# EAGLE board uc4h airspeed v020-wholes (EAGLE 7.5.0)
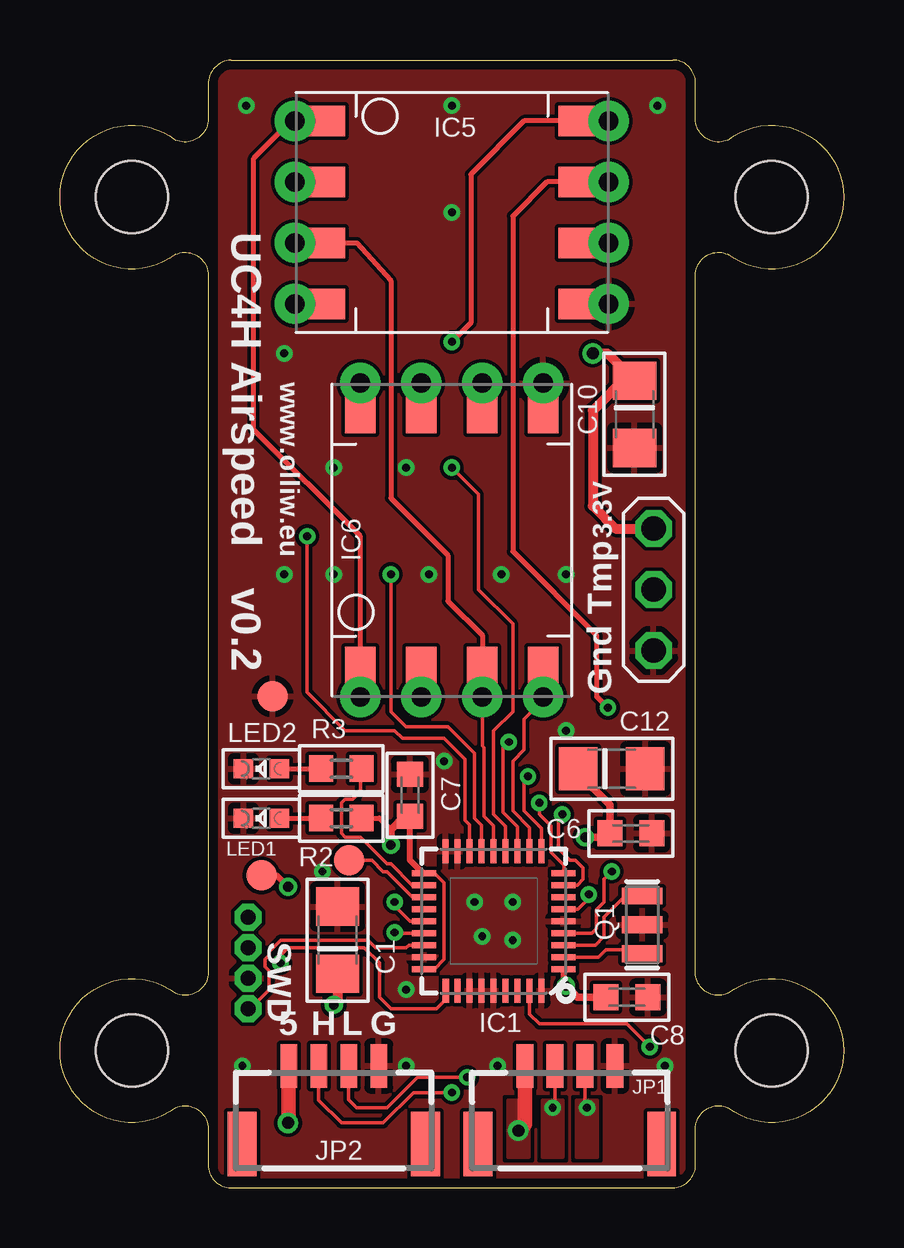
[diagram p0: board, top side]
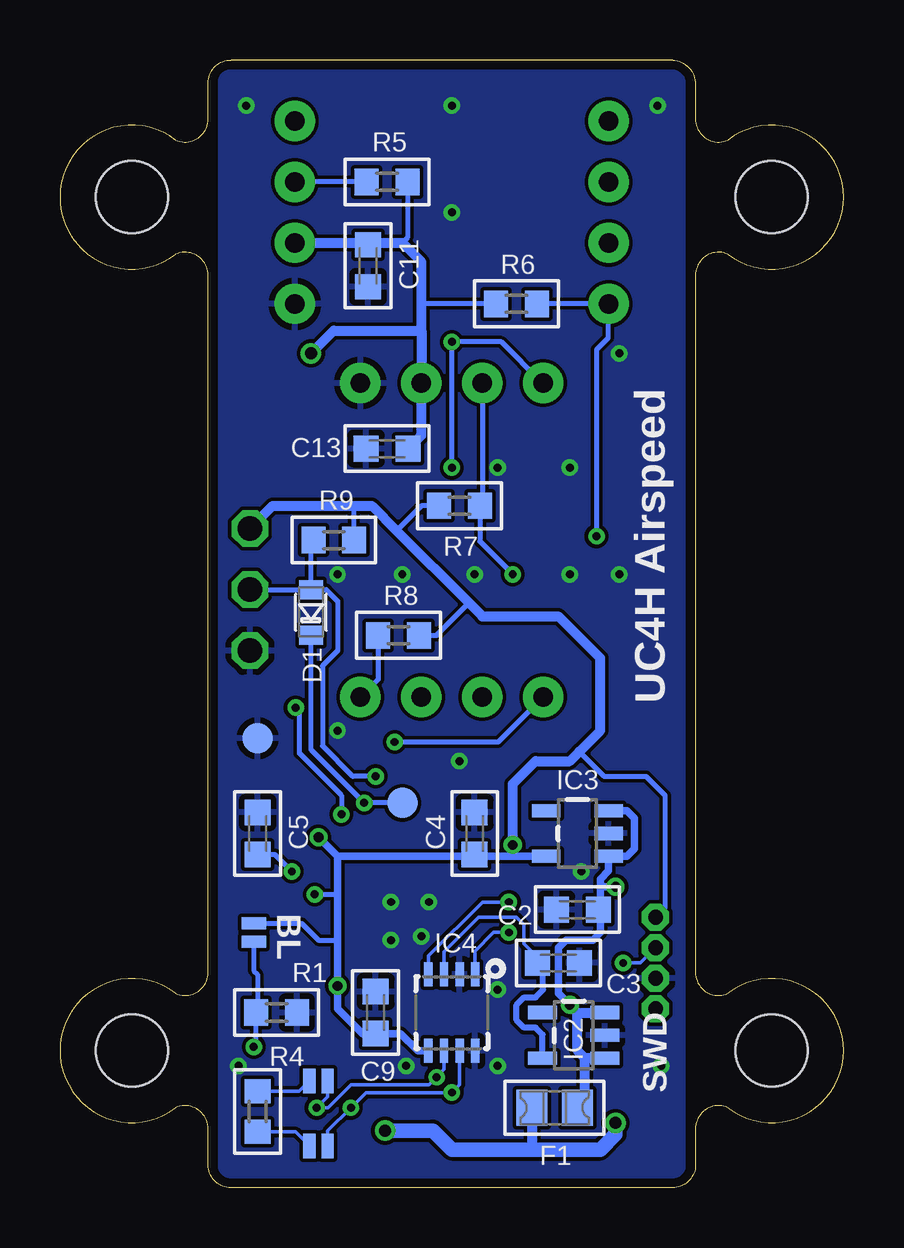
[diagram p1: board, bottom side, seen from below]

Size 32.67 x 46.99 mm. Coordinates in mm from the lower left corner, seen from the top.
Outline: 7.13,0 25.54,0 arc90 26.5,0.95 26.5,2.46 arc-114 27.84,3.33 arc255 27.84,8.1 arc-114 26.5,8.97 26.5,38.02 arc-114 27.84,38.89 arc255 27.84,43.66 arc-114 26.5,44.53 26.5,46.04 arc90 25.54,46.99 7.13,46.99 arc90 6.18,45.88 6.18,44.53 arc-114 4.83,43.66 arc255 4.83,38.89 arc-114 6.18,38.02 6.18,8.97 arc-114 4.83,8.1 arc255 4.83,3.33 arc-114 6.18,2.46 6.18,0.95 arc90 7.13,0
Copper layers (1*16): Top 0.0356mm / dielectric 1.5011mm / Bottom 0.0356mm
Design rules "ow-oshpark-2layer": minimum track width 6mil, minimum drill 13mil, track to track 6mil, track to pad 6mil, pad to pad 6mil, via to via 6mil, smd to smd 6mil, copper to edge 15mil, drill to drill 6mil, minimum pad ring 7mil, minimum via ring 7mil, stop-mask expansion 2.5mil, vias tented up to drill 26mil, thermal gap 10mil
Holes 3 mm at 3,41.27 29.67,41.27 3,5.71 29.67,5.71

## Footprints (pad centres in the part's own frame; a part is rotated, then mirrored left to right if it is on the bottom)
C1206 = smd 1.6 x 1.8: 1 -1.4,0; 2 1.4,0
C0603K = smd 1.05 x 1.08: 1 -0.875,0; 2 0.875,0
SOD110-R = smd 0.8 x 1: A 0.95,0; C -0.95,0
FUSE-0805 = smd 1.3 x 1.5: 1 -0.95,0; 2 0.95,0
VFQFPN36 = smd 1 x 0.25: 1 -2.9,2; 2 -2.9,1.5; 3 -2.9,1; 4 -2.9,0.5; 5 -2.9,0; 6 -2.9,-0.5; 7 -2.9,-1; 8 -2.9,-1.5; 9 -2.9,-2; 19 2.9,-2; 20 2.9,-1.5; 21 2.9,-1; 22 2.9,-0.5; 23 2.9,0; 24 2.9,0.5; 25 2.9,1; 26 2.9,1.5; 27 2.9,2 | smd 0.25 x 1: 10 -2,-2.9; 11 -1.5,-2.9; 12 -1,-2.9; 13 -0.5,-2.9; 14 0,-2.9; 15 0.5,-2.9; 16 1,-2.9; 17 1.5,-2.9; 18 2,-2.9; 29 1.5,2.9; 30 1,2.9; 31 0.5,2.9; 32 0,2.9; 33 -0.5,2.9; 34 -1,2.9; 35 -1.5,2.9; 36 -2,2.9 | smd 0.27 x 1: 28 2,2.9
SOT23-5 = smd 0.55 x 1.2: 1 -0.95,-1.3; 2 0,-1.3; 3 0.95,-1.3; 4 0.95,1.3; 5 -0.95,1.3
HVSON8 = smd 1 x 0.35: 1 -1.6,0.975; 2 -1.6,0.325; 3 -1.6,-0.325; 4 -1.6,-0.975; 5 1.6,-0.975; 6 1.6,-0.325; 7 1.6,0.325; 8 1.6,0.975
HONEYWELL-8 = drill 0.813 pad 1.676: 1 -6.54,3.81; 2 -6.54,1.27; 3 -6.54,-1.27; 4 -6.54,-3.81; 5 6.54,-3.81; 6 6.54,-1.27; 7 6.54,1.27; 8 6.54,3.81 | smd 2.54 x 1.27: P$9 -5.715,3.81; P$10 -5.715,1.27; P$11 -5.715,-1.27; P$12 -5.715,-3.81; P$13 5.715,-3.81; P$14 5.715,-1.27; P$15 5.715,1.27; P$16 5.715,3.81
SM04B-GHS-TB = smd 0.7 x 1.8: 1 -1.875,4.6; 2 -0.625,4.6; 3 0.625,4.6; 4 1.875,4.6 | smd 1.2 x 2.7: FIT@1 -3.825,1.35; FIT@2 3.825,1.35
PINHEAD_3X1 = drill 1.016 octagon: 1 0,0; 2 0,-2.54; 3 0,-5.08
CHIPLED_0603 = smd 0.8 x 0.8: A 0,-0.75; C 0,0.75
RESONATOR-SMD = smd 0.7 x 1.7: 1 -1.2,0; 2 0,0; 3 1.2,0
R0603 = smd 1 x 1.1: 1 -0.85,0; 2 0.85,0
SJ_2S-NO = smd 0.508 x 1.016: 1 -0.381,0; 2 0.381,0
4X1_1P27_OCT_BILEX = drill 0.61 pad 1.118 octagon: 1 0,0; 2 0,-1.27; 3 0,-2.54; 4 0,-3.81
B1,27 = smd 1.27 x 1.27: TP 0,0

## Placement (x,y rotation side)
C1  10u/20V  [C1206]  11.57,10.32 90 top
C2  100n  [C0603K]  11.1,11.59 180 bottom
C3  1u  [C0603K]  11.89,9.37 0 bottom
C4  1u  [C0603K]  15.38,14.76 90 bottom
C5  100n  [C0603K]  24.43,14.76 90 bottom
C6  100n  [C0603K]  23.8,14.76 0 top
C7  100n  [C0603K]  14.59,16.35 90 top
C8  100n  [C0603K]  23.64,7.94 0 top
C9  100n  [C0603K]  19.51,7.3 90 bottom
C10  10u/10V  [C1206]  23.96,32.23 270 top
C11  100n  [C0603K]  19.83,38.42 270 bottom
C12  10u/10V  [C1206]  23,17.46 0 top
C13  100n  [C0603K]  19.03,30.8 180 bottom
D1  BAT54J  [SOD110-R]  22.21,23.97 90 bottom
F1  0ZCK0020FF2G  [FUSE-0805]  12.05,3.33 180 bottom
IC1  STM32F103T8  [VFQFPN36]  18.08,11.11 180 top
IC2  MIC5219-5.0YM5-TR  [SOT23-5]  11.26,6.35 90 bottom
IC3  MIC5219-3.3YM5-TR  [SOT23-5]  11.1,14.76 90 bottom
IC4  TJA1051TK/3  [HVSON8]  16.34,7.3 270 bottom
IC5  HW-RSC  [HONEYWELL-8]  16.34,40.64 0 top
IC6  HW-RSC  [HONEYWELL-8]  16.34,26.99 90 top
JP1  JST-GH-4  [SM04B-GHS-TB]  21.26,0.48 0 top
JP2  JST-GH-4  [SM04B-GHS-TB]  11.41,0.48 0 top
JP3  PINHEAD_3X1  [PINHEAD_3X1]  24.75,27.46 0 top
LED1  red  [CHIPLED_0603]  8.4,15.4 90 top
LED2  green  [CHIPLED_0603]  8.4,17.46 90 top
Q1  CSTCE8M00G55-R0  [RESONATOR-SMD]  24.27,10.95 90 top
R1  10k  [R0603]  23.64,7.3 180 bottom
R2  4.7k  [R0603]  11.73,15.4 180 top
R3  1k  [R0603]  11.73,17.46 180 top
R4  120  [R0603]  24.43,3.17 90 bottom
R5  1k  [R0603]  19.03,41.91 0 bottom
R6  1k  [R0603]  13.64,36.83 180 bottom
R7  1k  [R0603]  16.02,28.42 180 bottom
R8  1k  [R0603]  18.56,23.02 0 bottom
R9  4.7k  [R0603]  21.26,26.99 0 bottom
SJ1  BOOT0  [SJ_2S-NO]  24.59,10.64 270 bottom
SJ2  [SJ_2S-NO]  21.89,1.75 0 bottom
SJ3  [SJ_2S-NO]  21.89,4.45 0 bottom
SWD  PH4  [4X1_1P27_OCT_BILEX]  7.84,11.27 0 top
TP1  TPB1,27  [B1,27]  12.05,13.65 0 top
TP2  TPB1,27  [B1,27]  8.87,20.48 0 top
TP3  TPB1,27  [B1,27]  8.4,13.02 0 top
TP4  TPB1,27  [B1,27]  18.4,16.03 0 bottom
TP5  TPB1,27  [B1,27]  24.43,18.73 0 bottom

## Library data of the parts
C1-C13 R1-R9 = rcl
D1 = diode
F1 IC4-IC6 JP1-JP3 SWD = # stdlib
IC1 = # stm32
IC2 IC3 Q1 SJ1-SJ3 = # SparkFun2
LED1 LED2 = led
TP1-TP5 = testpad

## Nets
3.3V: C4.1 C6.1 C7.1 C8.1 C9.1 C10.1 C11.1 C12.1 C13.1 IC1.1 IC1.6 IC1.19 IC1.27 IC3.5 IC4.5 IC5.6 IC6.6 JP3.1 R2.1 R5.2 R6.2 R7.2 R8.2 R9.2 SJ1.1 SWD.1
5V: C3.1 IC2.5 IC4.3
A1: IC1.33
A2: IC1.34
CAN-5V: C1.1 C2.1 F1.1 IC2.1 IC2.3 IC3.1 IC3.3 TP3.TP
CAN-PWR-IN: F1.2 JP1.1 JP2.1
CANH: IC4.7 JP1.2 JP2.2 SJ2.2
CANL: IC4.6 JP1.3 JP2.3 SJ3.2
CANRX: IC1.23 IC4.4
CANTX: IC1.24 IC4.1
CS: IC1.16 IC5.4 R6.1
CS2: IC1.11 IC6.4 R8.1
CS_EE: IC1.8 IC5.7 R5.1
CS_EE2: IC1.15 IC6.7 R7.1
DRDY: IC5.2
DRDY2: IC6.2
GND: C1.2 C2.2 C3.2 C4.2 C5.2 C6.2 C7.2 C8.2 C9.2 C10.2 C11.2 C12.2 C13.2 IC1.5 IC1.17 IC1.18 IC1.26 IC1.30 IC1.31 IC1.32 IC1.36 IC2.2 IC3.2 IC4.2 IC4.8 IC5.5 IC6.5 JP1.4 JP2.4 JP3.3 LED1.C LED2.C Q1.2 R1.1 SWD.3 TP2.TP TP5.TP
LED: IC1.20 R3.1
N$1: C5.1 IC1.4
N$2: LED2.A R3.2
N$4: R4.1 SJ2.1
N$5: IC1.2 Q1.1
N$6: IC1.3 Q1.3
N$7: R4.2 SJ3.1
N$8: IC1.35 R1.2 SJ1.2
N$9: LED1.A R2.2
RX1: IC1.22
RX2: D1.A IC1.10 JP3.2 R9.1
SCK: IC1.12 IC5.1 IC6.1
SDI: IC1.14 IC5.3 IC6.3
SDO: IC1.13 IC5.8 IC6.8
SWCLK: IC1.28 SWD.2
SWDIO: IC1.25 SWD.4
TX1: IC1.21 TP1.TP
TX2: D1.C IC1.9 TP4.TP

## Tracks (layer width: path | path; a pad name or v marks a point on that pad's centre or on a via)
3.3V  (via drill 0.33, 0.4, 0.5)
  Top 0.152: IC1.19 15.61,13.11 16.02,12.7 16.02,9.53 15.61,9.11 IC1.27 | 23,14.85 C6.1 | 14.51,15.4 C7.1 14.35,15.48 | 20.98,8.46 v21.1,8.41 | IC1.6 21.6,11.61 22.05,12.06 v22.05,12.22
  Top 0.203: R2.1 13.32,15.4 13.8,14.92
  Top 0.254: IC1.19 15.02,13.22 14.59,13.65 C7.1 | IC1.1 20.98,8.46
  Top 0.305: v21.89,14.61 22.69,14.61 22.84,14.76 C6.1 22.92,15.96 21.6,17.27 C12.1 | v13.8,14.29 13.8,14.92 14.35,15.48 | C8.1 21.57,7.94 v21.1,8.41
  Top 0.406: JP3.1 23.16,27.46 22.21,28.42 22.21,32.38 23.77,33.94 C10.1 22.82,34.77 v22.21,34.77
  Bottom 0.152: 21.16,8.48 v21.1,8.41
  Bottom 0.203: 15.54,13.81 15.22,13.81 | R6.2 17.61,36.83 | R5.2 18.18,39.59 18.4,39.37 | 22.74,28.31 22.84,28.42 | SWD.1 7.45,11.67 7.45,16.35 8.24,17.14 9.99,17.14 11.02,18.18 | R8.2 16.97,23.02 15.62,24.37 | R9.2 20.41,28.36 20.62,28.42 | R7.2 17.61,28.42 18.64,27.38 | v22.05,12.22 21.1,12.22 | SJ1.1 22.59,11.02 21.89,10.32 21.1,10.32
  Bottom 0.305: IC3.5 13.8,13.81 | 13.8,13.81 15.22,13.81 15.47,13.97 C4.1 | 15.54,13.81 21.1,13.81 | IC4.5 17.75,5.7 18.48,6.43 C9.1 20.06,6.43 21.1,7.46 v21.1,8.41 21.1,10.32 21.1,12.22 21.1,13.81 | v13.8,14.29 13.8,13.81 | v21.89,14.61 21.1,13.81
  Bottom 0.406: v22.21,34.77 21.26,35.72 17.61,35.72 | 17.61,35.72 IC6.6 17.61,31.35 C13.1 | 17.61,35.72 17.61,36.83 17.61,38.58 18.4,39.37 19.99,39.37 | IC5.6 19.99,39.37 | C11.1 19.99,39.37 | JP3.1 23.8,28.42 22.84,28.42 20.62,28.42 19.67,28.42 18.64,27.38 15.62,24.37 15.07,23.81 11.89,23.81 10.14,22.07 10.14,19.05 11.02,18.18 11.41,17.78 12.84,17.78 13.8,16.83 v13.8,14.29
5V
  Bottom 0.152: IC4.3 16.66,9.84 15.22,11.27 13.64,11.27 13.32,10.95 13.32,10.16 12.68,9.53 12.68,9.29 C3.1
  Bottom 0.254: IC2.5 12.56,6.38 12.84,6.67 13.32,6.67 13.64,6.99 13.64,7.62 13.32,7.94 12.84,7.94 12.53,8.26 12.53,9.29
  Bottom 0.305: 12.53,9.29 C3.1
CAN-5V  (via drill 0.4)
  Top 0.254: TP3.TP 9.03,13.02 v9.51,12.54
  Top 0.406: C1.1 11.57,7.78 v11.41,7.62
  Bottom 0.305: IC3.3 9.03,15.71 8.72,15.4 8.72,14.13 9.03,13.81 IC3.1 9.8,13.21 10.14,12.86 10.14,12.54 | IC2.1 10.62,5.4 | IC2.3 | v11.41,7.62 11.89,8.1 11.89,10 11.57,10.32 10.46,10.32 10.14,10.64 10.14,11.35 C2.1 10.14,11.51 10.14,12.54 | v9.51,12.54 10.14,12.54
  Bottom 0.406: IC2.1 10.78,5.4 | 10.78,5.4 11.1,5.71 11.1,7.3 | 11.1,7.3 IC2.3 | v11.41,7.62 11.1,7.3 | F1.1 10.94,3.33 10.78,3.49 10.78,5.4
CAN-PWR-IN  (via drill 0.5)
  Top 0.152: v9.51,2.7 9.54,2.67
  Top 0.61: 9.54,2.67 JP2.1 | JP1.1 19.38,2.65 v19.11,2.38
  Bottom 0.406: F1.2 13,1.75 13,1.59
  Bottom 0.61: v19.11,2.38 17.13,2.38 16.34,1.59 13,1.59 10.14,1.59 9.51,2.22 v9.51,2.7
  pour Top (no thermals): 19.55,3.65 18.68,3.65 18.68,1.27 19.55,1.27
CANH  (via drill 0.33)
  Top 0.152: JP2.2 10.79,3.64 11.73,2.7 13.48,2.7 14.75,3.97 v16.34,3.97 | JP1.2 20.63,3.42 v20.54,3.33
  Bottom 0.152: IC4.7 16.01,4.29 v16.34,3.97 19.91,3.97 v20.54,3.33 21.51,2.37 SJ2.2
  pour Top (no thermals): 20.11,3.65 20.98,3.65 20.98,1.27 20.11,1.27
CANL  (via drill 0.33)
  Top 0.152: JP2.3 12.04,3.66 12.37,3.33 13.64,3.33 14.91,4.6 v16.97,4.6 | JP1.3 21.88,3.48 v21.97,3.33
  Bottom 0.152: IC4.6 16.66,4.93 v16.97,4.6 17.29,4.29 20.54,4.29 21.49,3.33 v21.97,3.33 21.51,3.79 SJ3.2
  pour Top (no thermals): 21.53,3.65 22.41,3.65 22.41,1.27 21.53,1.27
CANRX  (via drill 0.33)
  Top 0.152: IC1.23 14.59,11.11 13.95,11.75 v13.95,11.91
  Bottom 0.152: IC4.4 17.31,9.66 15.07,11.91 v13.95,11.91
CANTX  (via drill 0.33)
  Top 0.152: IC1.24 13.98,10.61 v13.95,10.64
  Bottom 0.152: IC4.1 15.36,9.87 14.59,10.64 v13.95,10.64
CS  (via drill 0.33)
  Top 0.152: v10.3,27.15 10.3,20.64 11.89,19.05 13.95,19.05 14.27,18.73 16.02,18.73 16.89,17.86 16.89,15.32 17.08,15.13 IC1.16
  Bottom 0.152: 9.83,36.8 IC5.4
  Bottom 0.203: R6.1 9.86,36.83 9.83,36.8 9.83,35.4 10.3,34.92 v10.3,27.15
CS2
  Top 0.152: IC6.4 20.15,20.32 19.35,19.53 19.35,18.26 18.88,17.78 18.88,15.72 19.58,15.01 IC1.11
  Bottom 0.203: R8.1 19.41,21.18 IC6.4
CS_EE  (via drill 0.33)
  Top 0.152: IC1.8 21.57,12.61 21.81,12.86 21.81,13.34 21.49,13.65 21.26,13.65 20.78,14.13 20.78,15.4 v20.94,15.56
  Top 0.203: IC5.7 20.3,41.91 18.88,40.48 18.88,26.51 22.37,23.02 22.37,20.48 v22.84,20
  Bottom 0.203: R5.1 IC5.7 | v20.94,15.56 20.94,16.35 22.69,18.1 22.69,19.84 v22.84,20
CS_EE2  (via drill 0.33)
  Top 0.152: v13.8,25.56 13.8,19.84 14.43,19.21 16.18,19.21 17.29,18.1 17.29,15.4 17.58,15.11 IC1.15
  Bottom 0.203: IC6.7 15.07,28.52 R7.1 15.17,26.93 v13.8,25.56
GND  (via drill 0.33)
  other vias: 17.29,11.91 17.61,10.48 18.88,10.32 18.88,11.91 14.43,8.26 14.43,5.08 18.24,5.08 7.6,5.08 25.23,5.08 10.94,13.18 11.41,25.56 14.43,30 11.41,30 9.35,25.56 18.4,25.56 7.76,45.09 24.91,45.09 16.34,40.64 9.35,34.77 16.34,45.09 21.1,25.56 15.38,25.56 16.02,17.78 21.1,19.05
  pour Bottom (isolate 0.152, rank 6): 6.65,46.67 26.02,46.67 26.02,0.16 6.65,0.16
  pour Top (isolate 0.152, rank 6): 6.65,46.67 26.02,46.67 26.02,0.16 6.65,0.16
LED
  Top 0.152: R3.1 12.53,17.41 12.53,16.51 12.21,16.19 11.89,16.19 11.73,16.03 11.73,14.76 11.89,14.61 12.53,14.61 13.64,13.49 13.8,13.49 14.68,12.61 IC1.20
N$1  (via drill 0.33)
  Top 0.152: IC1.4 22.19,10.61 22.37,10.79 22.37,11.59 22.69,11.91 22.69,12.86 v23,13.18
  Bottom 0.203: C5.1 23.72,13.89 v23,13.18
N$2
  Top 0.203: LED2.A R3.2
N$4
  Bottom 0.152: R4.1 22.85,2.33 SJ2.1
N$5
  Top 0.152: IC1.2 22.46,9.61 22.76,9.91 24.11,9.91 Q1.1
N$6
  Top 0.152: IC1.3 22.32,10.11 22.69,10.48 22.69,11.27 23.64,12.22 23.96,11.91 24.18,12.06 Q1.3
N$7
  Bottom 0.152: R4.2 22.69,4.03 SJ3.1
N$8  (via drill 0.33)
  Top 0.152: IC1.35 19.58,7.23 19.99,6.83 23.64,6.83 v24.59,5.87
  Bottom 0.152: 24.43,6.88 R1.2
  Bottom 0.203: SJ1.2 24.59,9.05 24.43,8.89 24.43,7.36 R1.2 24.49,5.98 v24.59,5.87
N$9
  Top 0.203: LED1.A R2.2
RX2  (via drill 0.33)
  Top 0.152: IC1.10 20.08,14.99 19.35,15.72 19.35,16.99 v19.51,17.14
  Bottom 0.203: v19.51,17.14 20.46,17.14 21.73,18.41 21.73,21.75 21.1,22.38 21.1,24.45 21.57,24.92 D1.A | D1.A 22.21,26.89 R9.1 | JP3.2 D1.A
SCK  (via drill 0.33)
  Top 0.152: IC1.12 19.08,15.03 18.48,15.64 18.48,18.34 v18.72,18.57
  Top 0.203: IC6.1 12.53,27.15 8.08,31.59 8.08,42.89 9.64,44.45 IC5.1
  Bottom 0.203: v18.72,18.57 14.4,18.57 IC6.1
SDI
  Top 0.152: IC1.14 18.08,15.08 17.68,15.48 17.68,18.34 17.61,18.41 IC6.3
  Top 0.203: IC6.3 17.61,23.02 16.18,24.45 16.18,26.35 13.8,28.73 13.8,37.78 12.37,39.37 IC5.3
SDO  (via drill 0.33)
  Top 0.152: IC1.13 18.58,15.06 18.08,15.56 18.08,19.05 18.88,19.84 18.88,23.5 17.45,24.92 17.45,28.89 v16.34,30
  Top 0.203: IC6.8 12.49,33.53 | IC5.8 19.35,44.45 17.13,42.23 17.13,36.04 v16.34,35.24
  Bottom 0.152: IC6.8 12.56,33.53
  Bottom 0.203: v16.34,30 v16.34,35.24 14.27,35.24 12.56,33.53
SWCLK  (via drill 0.33)
  Top 0.152: IC1.28 16.08,7.84 15.7,7.46 13.8,7.46 13.32,7.94 13.32,9.37 12.68,10 9.51,10 9.19,9.68 v9.19,9.37
  Bottom 0.152: v9.19,9.37 8.48,9.37 SWD.2
SWDIO
  Top 0.152: IC1.25 14.54,10.11 14.43,10 13.16,10 12.84,10.32 9.19,10.32 8.72,9.84 8.72,9.68 8.56,9.53 8.56,9.21 8.72,9.05 8.72,8.26 7.92,7.46 SWD.4
TX1
  Top 0.152: IC1.21 14.7,12.11 13.64,13.18 13.48,13.18 13,13.65 TP1.TP
TX2  (via drill 0.33)
  Top 0.152: IC1.9 21,13.43 20.46,13.97 20.46,15.08 19.99,15.56 v19.99,16.03
  Bottom 0.203: D1.C 22.21,18.26 v19.99,16.03 TP4.TP

## Text on the board
tNames: IC5 | UC4H Airspeed | www.olliw.eu | 3.3V | IC6 | Tmp | v0.2 | Gnd | SWD | 5 | H | L | G
bNames: UC4H Airspeed | BL | SWD